# Altium PCB ESC.PcbDoc (part 1 of 2)
Units mil, origin at the board's own origin, x right, y up, seen from the top; angles counter-clockwise.
Board outline 7000 x 5000 mil, 2 copper layers (Top Layer, Bottom Layer), stack 64.567 mil thick; 83 components, 105 nets, 405 pads, 157 vias.
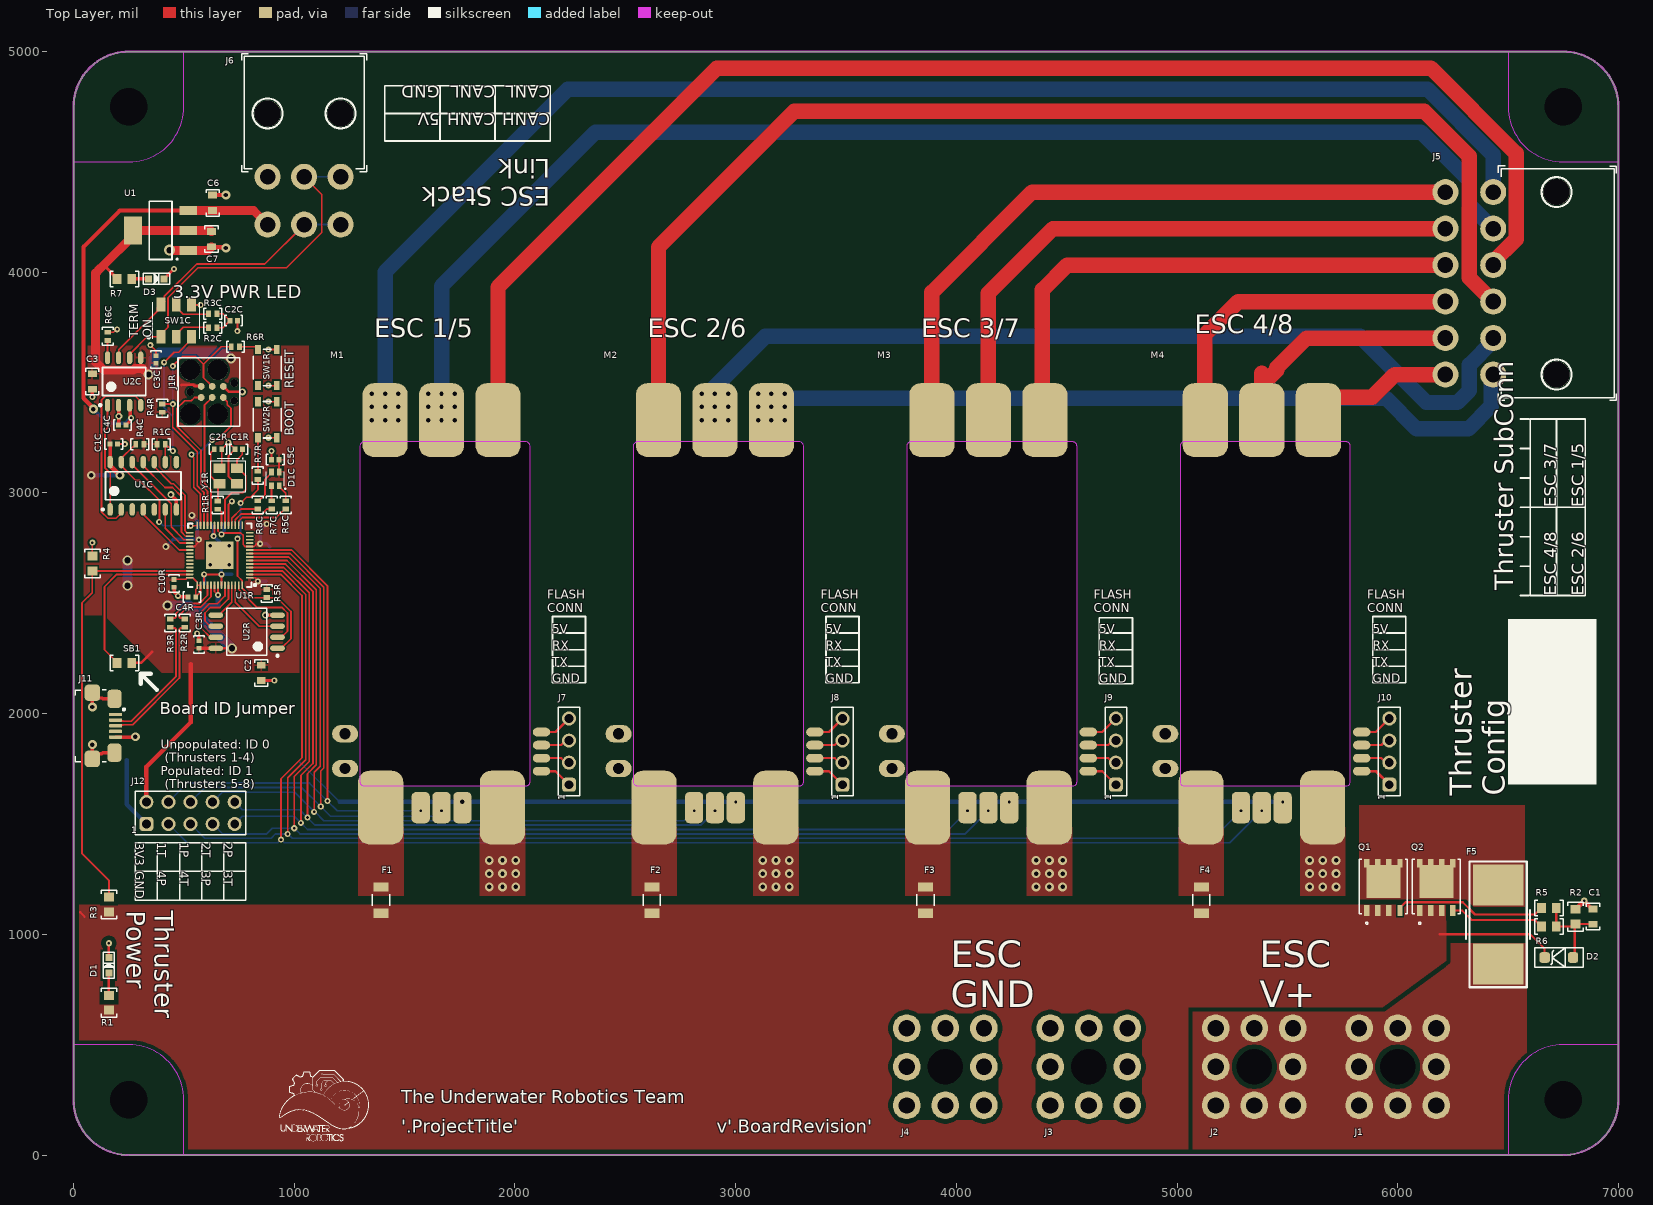
[diagram p0: Top Layer view]
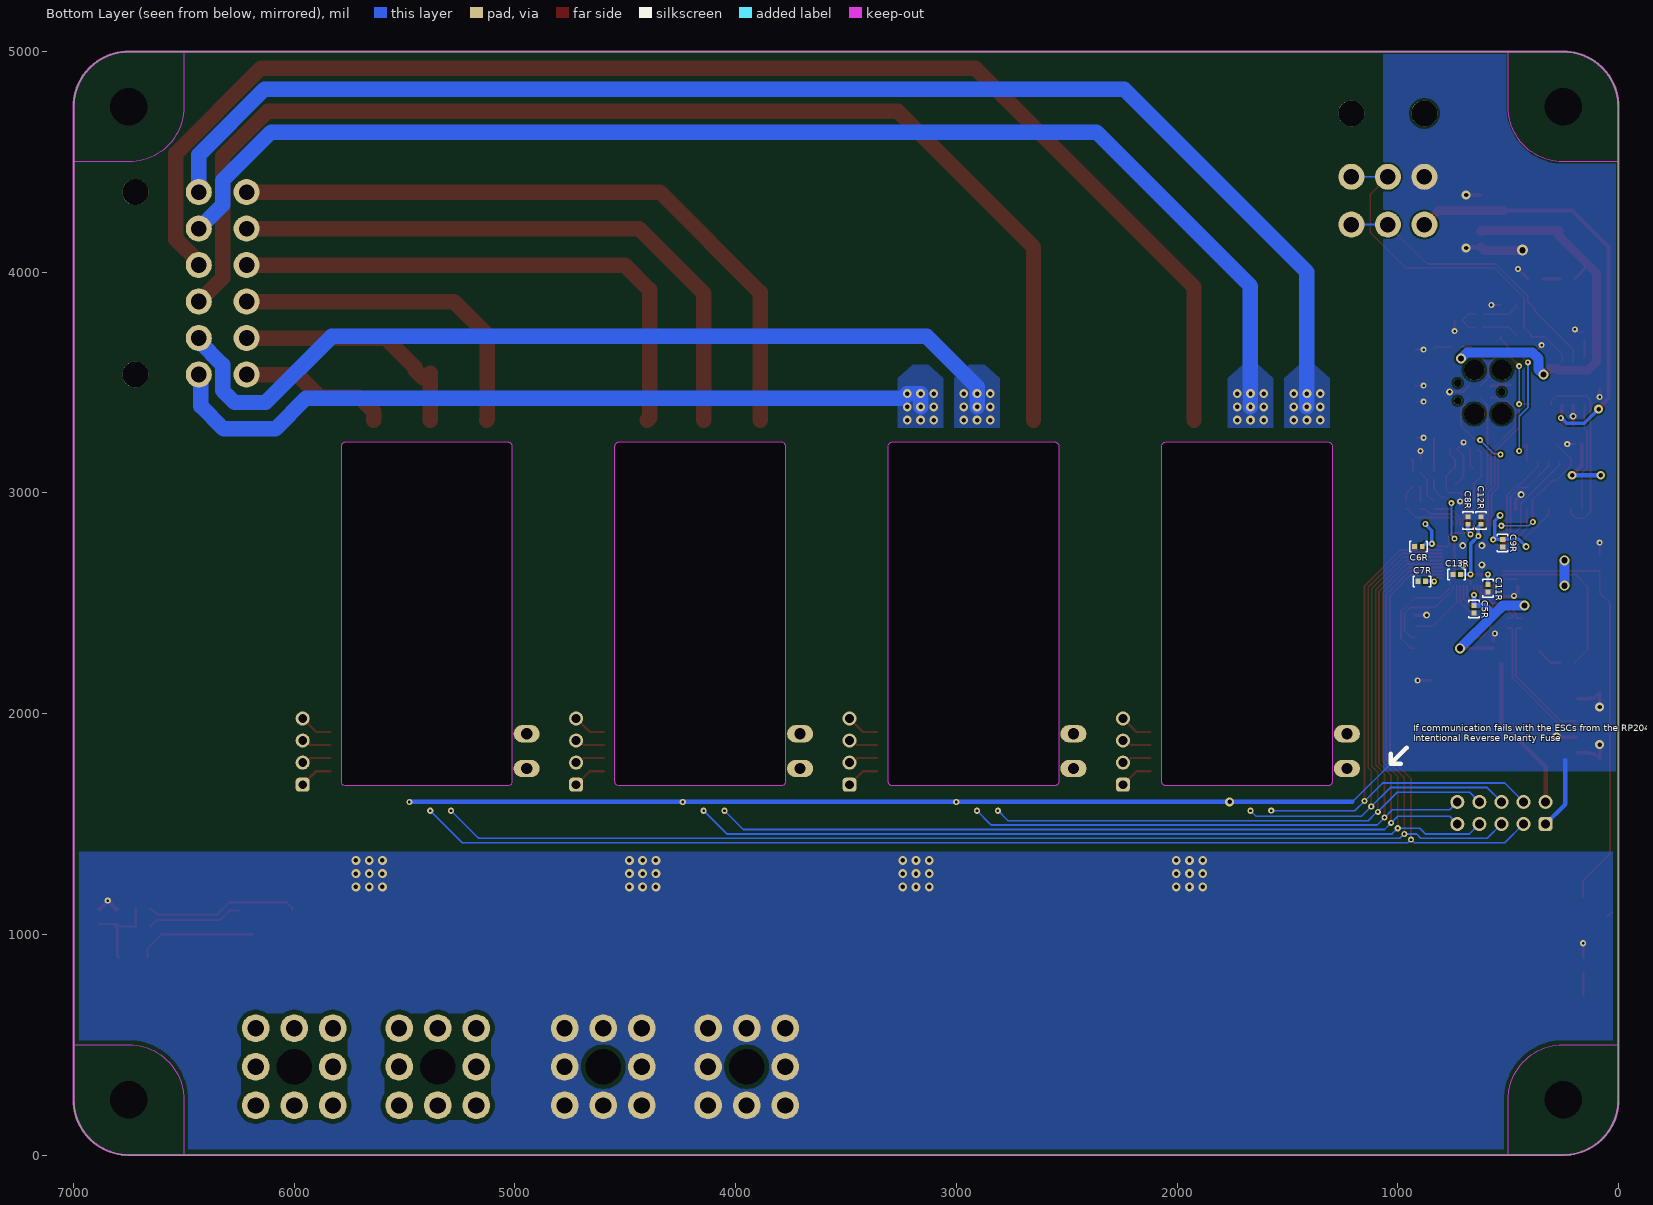
[diagram p1: Bottom Layer view, seen from below]
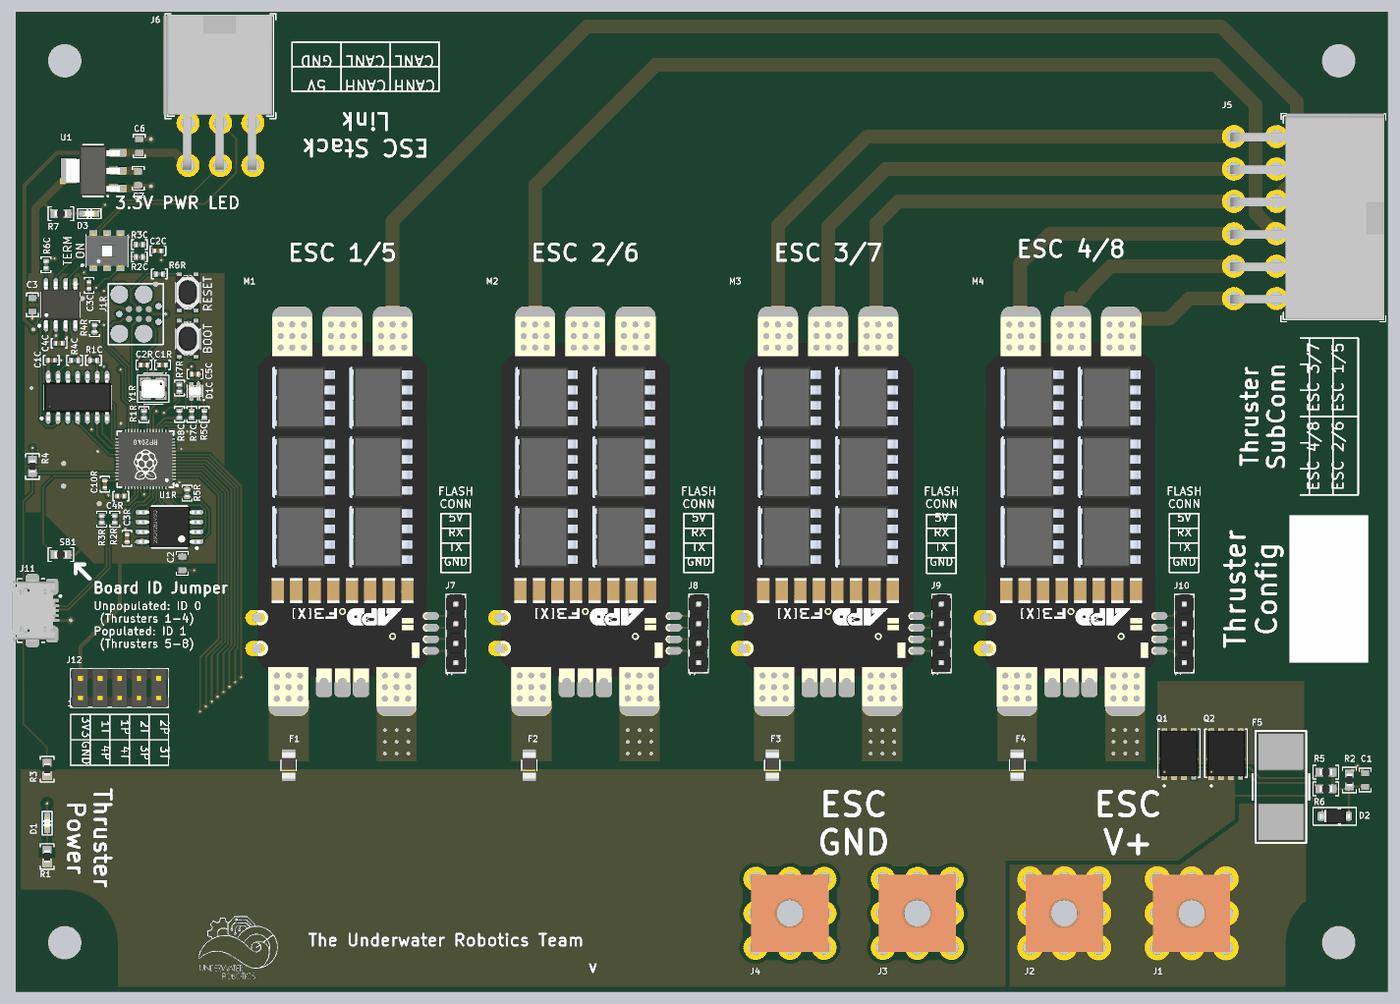
[diagram p3: 3D render of the assembled board from above, using the file's embedded part models]
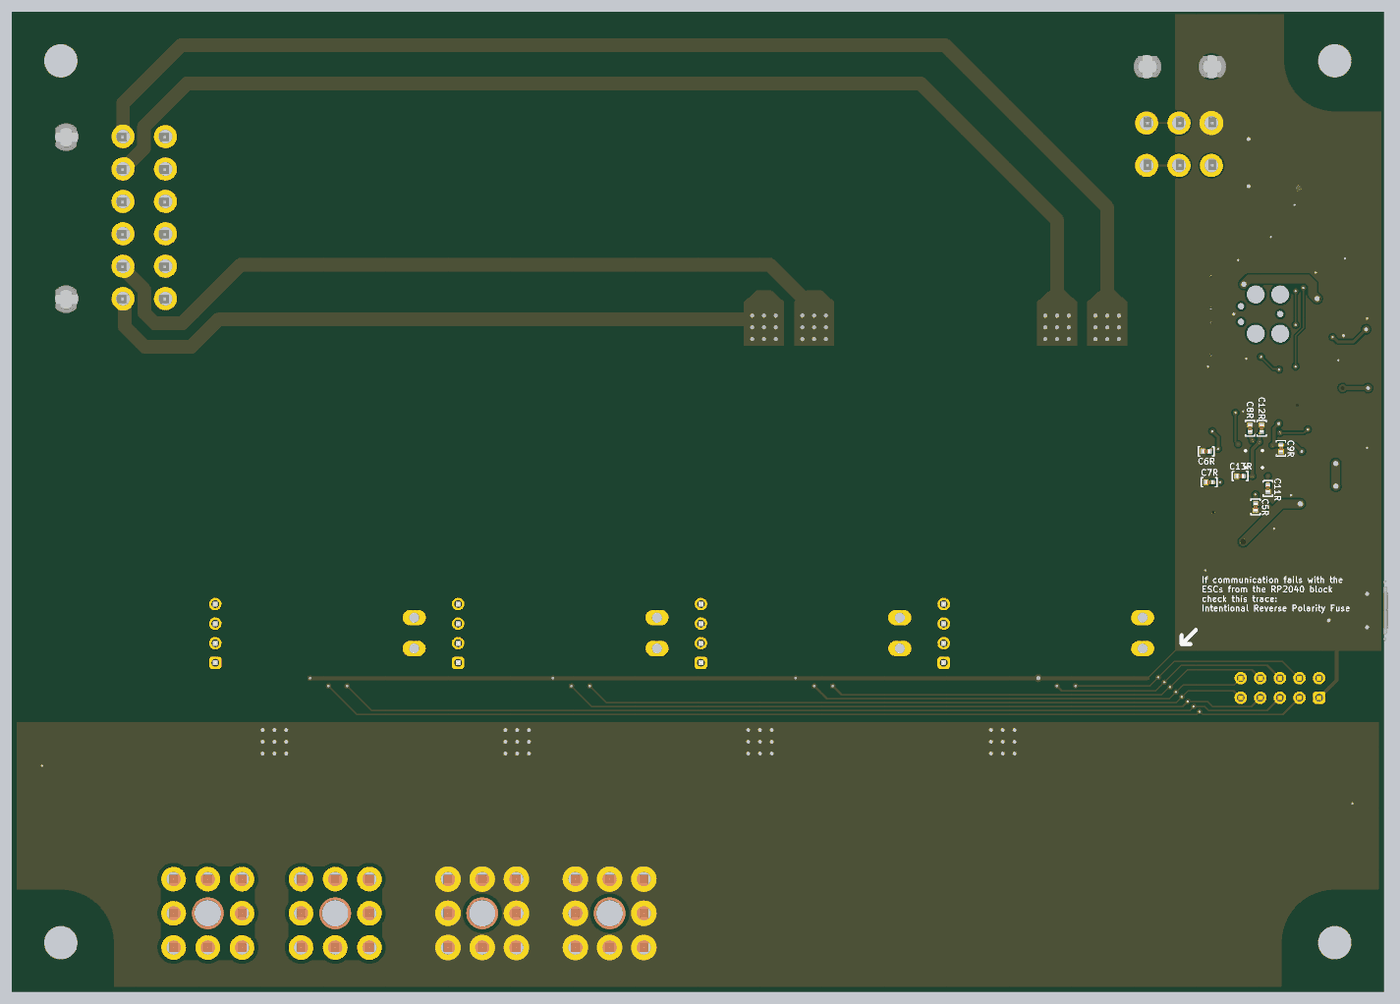
[diagram p4: 3D render of the assembled board from below, using the file's embedded part models]

## Layer stack, top to bottom
Top Solder: solder mask 0.5, Solder Resist, Dk 3.8
Top Layer: signal copper 2.7559
Dielectric: core 59.0551, FR-4, Dk 4.5
Bottom Layer: signal copper 2.7559
Bottom Solder: solder mask 0.5, Solder Resist, Dk 3.8

## Board outline
250,0 cw(c250,250) 0,250 0,4750 cw(c250,4750) 250,5000 6750,5000 cw(c6750,4750) 7000,4750 7000,250 cw(c6750,250) 6750,0

## Design rules (kind name [scope] priority, off if disabled: settings)
BoardOutlineClearance "BoardOutlineClearance JLCPCB" [All] p1: gap=7.87 ignorepadtopadclearanceinfootprint=FALSE
Clearance "Clearance Power" [InNet('VCC') or InNet('GND') or InNet('VIN') vs not InNet('NetQ1_4')] p1: gap=20 ignorepadtopadclearanceinfootprint=FALSE except(10: Arc-Hole Track-Hole SMDPad-Region SMDPad-Hole THPad-Hole Via-Hole Fill-Hole Poly-Hole Region-Hole Text-Hole)
Clearance "Clearance JLCPCB 2oz" [All] p2: gap=7.87 ignorepadtopadclearanceinfootprint=FALSE except(10: Arc-Hole Track-Hole SMDPad-Hole THPad-Hole Via-Hole Fill-Hole Poly-Hole Region-Hole Text-Hole)
DiffPairsRouting [All] p1: maxlimit=10 minlimit=6 mostfreqgap=8 toplayer_minwidth=8 toplayer_maxwidth=15 toplayer_prefwidth=8 bottomlayer_minwidth=8 bottomlayer_maxwidth=15 bottomlayer_prefwidth=8 maxuncoupledlength=500
HoleSize "HoleSize JLCPCB Pad" [IsPad] p1: absolutevalues=TRUE maxlimit=248.03 minlimit=19.68 maxpercent=80.000 minpercent=20.000
HoleSize "HoleSize JLCPCB 2 layer" [All] p2: absolutevalues=TRUE maxlimit=248.03 minlimit=11.81 maxpercent=80.000 minpercent=20.000
HoleToHoleClearance "HoleToHoleClearance JLCPCB" [All] p1: gap=10 allowstackedmicrovias=TRUE
MinimumAnnularRing "MinimumAnnularRing JLCPCB Pad" [IsPad] p1: minimumring=11.81
MinimumAnnularRing "MinimumAnnularRing JLCPCB 2oz" [All] p2: minimumring=7.87
MinimumSolderMaskSliver [All] p1: minsoldermaskwidth=1
PlaneConnect [All] p1: planeconnectstyle=Direct reliefexpansion=20 reliefentries=4 reliefconductorwidth=10 reliefairgap=10
PolygonConnect "PolygonConnect 3V3" [InNet('3V3')] p1: thpad.connectstyle=Relief thpad.reliefconductorwidth=10 thpad.reliefentries=4 thpad.polygonreliefangle="90 Angle" thpad.airgapwidth=10 smdpad.connectstyle=Relief smdpad.reliefconductorwidth=10 smdpad.reliefentries=4 smdpad.polygonreliefangle="90 Angle" smdpad.airgapwidth=10 via.connectstyle=Direct via.reliefconductorwidth=10 via.reliefentries=4 via.polygonreliefangle="90 Angle" via.airgapwidth=10
PolygonConnect [All] p2: connectstyle=Direct reliefconductorwidth=15 reliefentries=4 polygonreliefangle="45 Angle" airgapwidth=10
RoutingVias "RoutingVias JLCPCB" [All] p1: holewidth=15.75 width=31.5 viastyle="Through Hole" minholewidth=11.81 minwidth=15.75 maxholewidth=28 maxwidth=50
SilkToSilkClearance [All] p1: silktosilkclearance=3
SilkToSolderMaskClearance "SilkToSolderMaskClearance JLCPCB" [IsPad] p1: minsilkscreentomaskgap=5.91 clearancetoexposedcopper=TRUE
SolderMaskExpansion "SolderMaskExpansion JLCPCB" [All] p1: expansion=1.97 istentingtop=FALSE
Width "Width JLCPCB 2oz" [All] p1: maxlimit=200 minlimit=7.87 preferedwidth=10 minimp=50.000000 maximp=50.000000 favimp=50.000000
23 further rules are at their usual default settings.

## Classes and differential pairs
component class U_RP2040_C: C1R C2R C3R C4R C5R C6R C7R C8R C9R C10R C11R C12R C13R J1R R1R R2R R3R R4R R5R R6R R7R SW1R SW2R U1R U2R Y1R
differential pair class "USB 2.0": USB USB_RP2040
component class U_RP2040_with_CAN: C1C C2C C3C C4C C5C D1C R1C R2C R3C R4C R5C R6C R7C R8C SW1C U1C U2C
component class ESC: C1 C2 C3 C4 C5 C6 C7 D1 D2 D3 F1 F2 F3 F4 F5 J1 J2 J3 J4 J5 J6 J7 J8 J9 J10 J11 J12 M1 M2 M3 M4 Q1 Q2 R1 R2 R3 R4 R5 R6 R7 SB1 SB? U1
differential pair USB: +USB_P -USB_N
differential pair USB_RP2040: +USB_RP2040_P -USB_RP2040_N

## Components (designator, comment, footprint, x,y, rotation, side; value= is the part's Value field where it differs from the comment)
C1 "1uF Ceramic 16V" CAPACITOR_0603 6885,1080 r270 top value=1uF
C1C "100nF Ceramic 25V" CAPACITOR_0402 181.81,3221.6 r0 top value=0.1uF
C1R "27pF Ceramic 50V" CAPACITOR_0402 748.74,3197.98 r180 top value=27pF
C2 "10uF Ceramic 6.3V" CAPACITOR_0603 850,2185 r270 top
C2C "4700pF Ceramic 25V" CAPACITOR_0402 725.12,3780.66 r180 top value=4.7nF
C2R "27pF Ceramic 50V" CAPACITOR_0402 654.25,3197.98 r0 top value=27pF
C3 "10uF Ceramic 6.3V" CAPACITOR_0603 85,3505 r270 top
C3C "100nF Ceramic 25V" CAPACITOR_0402 373.94,3604.63 r90 top value=0.1uF
C3R "100nF Ceramic 6.3V" CAPACITOR_0402 567.64,2313.33 r90 top value=0.1uF
C4C "100nF Ceramic 25V" CAPACITOR_0402 221.18,3308.22 r180 top value=0.1uF
C4R "1uF Ceramic 16V" CAPACITOR_0402 536.14,2528.69 r180 top value=1uF
C5C "1uF Ceramic 16V" CAPACITOR_0402 914.09,3150.74 r180 top value=1uF
C5R "100nF Ceramic 6.3V" CAPACITOR_0402 654.25,2473.57 r270 bottom value=0.1uF
C6 "10uF Ceramic 6.3V" CAPACITOR_0603 630,4315 r90 top
C6R "100nF Ceramic 6.3V" CAPACITOR_0402 906.22,2757.03 r0 bottom value=0.1uF
C7 "10uF Ceramic 6.3V" CAPACITOR_0603 625,4150 r270 top
C7R "100nF Ceramic 6.3V" CAPACITOR_0402 890.47,2599.55 r0 bottom value=0.1uF
C8R "100nF Ceramic 6.3V" CAPACITOR_0402 681.92,2875.14 r90 bottom value=0.1uF
C9R "100nF Ceramic 6.3V" CAPACITOR_0402 524.33,2772.78 r270 bottom value=0.1uF
C10R "100nF Ceramic 6.3V" CAPACITOR_0402 455,2590 r270 top value=0.1uF
C11R "1uF Ceramic 16V" CAPACITOR_0402 591.26,2568.06 r270 bottom value=1uF
C12R "100nF Ceramic 6.3V" CAPACITOR_0402 622.76,2875.14 r90 bottom value=0.1uF
C13R "100nF Ceramic 6.3V" CAPACITOR_0402 732.99,2631.05 r0 bottom value=0.1uF
D1 "150060BS75000" LED_0603 160,860 r90 top
D1C "EAST1616RGBB4" LED_0606_4SMD 914.09,3064.12 r90 top
D2 "Zener_Diode_10V_410mW" SOD-123 6730,895 r180 top
D3 "150060GS75000" LED_0603 375,3970 r0 top
F1 "0685H9150-01" 0501Series_LTF 1392.5,1155 r90 top
F2 "0685H9150-01" 0501Series_LTF 2620,1155 r90 top
F3 "0685H9150-01" 0501Series_LTF 3860,1155 r90 top
F4 "0685H9150-01" 0501Series_LTF 5110,1155 r90 top
F5 "1245HC60-RTR" "2-SMD Fuse" 6455,1045 r90 top
J1 "Redcube M4 Term 85A" "Redcube M4 Term 85A" 6000,400 r0 top locked
J1R "TagConnect SWD" TC2030-MCP 528.27,3457.82 r0 top
J2 "Redcube M4 Term 85A" "Redcube M4 Term 85A" 5350,400 r0 top locked
J3 "Redcube M4 Term 85A" "Redcube M4 Term 85A" 4600,400 r0 top locked
J4 "Redcube M4 Term 85A" "Redcube M4 Term 85A" 3950,400 r0 top locked
J5 "Mini-Fit Jr R/A" "CONN_MOLEX_MINIFIT JR_12 POS_R/A" 6468.03,3950 r90 top locked
J6 "Mini-Fit Jr R/A" "CONN_MOLEX_MINIFIT JR_6 POS_R/A" 1210,4720 r180 top locked
J7 "HEADER VERT 2.54MM" HEADER_4PIN_2.54MM 2245,1678.03 r90 top locked
J8 "HEADER VERT 2.54MM" HEADER_4PIN_2.54MM 3483.95,1678.03 r90 top locked
J9 "HEADER VERT 2.54MM" HEADER_4PIN_2.54MM 4722.9,1678.03 r90 top locked
J10 "HEADER VERT 2.54MM" HEADER_4PIN_2.54MM 5961.85,1678.03 r90 top locked
J11 "USB_MICRO R/A" CONN_MINIUSB 85,1945 r270 top
J12 "HEADER DUAL VERT 2.54MM" HEADER_2X5PIN_2.54MM 330,1500 r0 top
M1 "APD 80F3[X]" "APD 80F3[X]" 1667.24,1578.03 r90 top locked
M2 "APD 80F3[X]" "APD 80F3[X]" 2906.19,1578.03 r90 top locked
M3 "APD 80F3[X]" "APD 80F3[X]" 4145.14,1578.03 r90 top locked
M4 "APD 80F3[X]" "APD 80F3[X]" 5384.09,1578.03 r90 top locked
Q1 "MOSFET P-Ch 30V 60A SO-8" MOSFET_7DP-T1-GE3_VIS 5935,1215 r90 top
Q2 "MOSFET P-Ch 30V 60A SO-8" MOSFET_7DP-T1-GE3_VIS 6175,1215 r90 top
R1 "1k Ohm 5% 1/8W" RESISTOR_0603 160,690 r90 top
R1C "10k Ohm 1% 1/16W" RESISTOR_0402 396.97,3221.6 r0 top
R1R "1k Ohm 1% 1/16W" RESISTOR_0402 654.25,2944.95 r90 top
R2 "1k Ohm 5% 1/8W" RESISTOR_0603 6805,1080 r90 top
R2C "60.4 Ohm 1% 1/16W" RESISTOR_0402 630.63,3749.16 r0 top
R2R "27 Ohm 1% 1/16W" RESISTOR_0402 504.65,2410.58 r90 top
R3 "10k Ohm 0.5% 1/10W" RESISTOR_0603 160,1135 r90 top
R3C "60.4 Ohm 1% 1/16W" RESISTOR_0402 630.63,3812.15 r0 top
R3R "27 Ohm 1% 1/16W" RESISTOR_0402 438.64,2410.58 r90 top
R4 "1k Ohm 5% 1/10W" RESISTOR_0603 85,2680.3 r90 top
R4C "10k Ohm 1% 1/16W" RESISTOR_0402 299.92,3221.6 r180 top
R4R "10k Ohm 1% 1/16W" RESISTOR_0402 402.28,3384 r90 top
R5 "27 Ohm 5% 1/8W" RESISTOR_0603 6685,1120 r0 top
R5C "604 Ohm 1% 1/16W" RESISTOR_0402 961.34,2946.01 r90 top
R5R "10k Ohm 1% 1/16W" RESISTOR_0402 874.72,2544.44 r270 top
R6 "27 Ohm 5% 1/8W" RESISTOR_0603 6685,1035 r180 top
R6C "10k Ohm 1% 1/16W" RESISTOR_0402 154.06,3709.79 r90 top
R6R "1k Ohm 1% 1/16W" RESISTOR_0402 732.99,3662.55 r180 top
R7 "62 Ohm 1% 1/4W" RESISTOR_0603 230,3970 r180 top
R7C "200 Ohm 1% 1/16W" RESISTOR_0402 898.35,2946.01 r90 top
R7R "1k Ohm 1% 1/16W" RESISTOR_0402 835.35,3079.87 r270 top
R8C "200 Ohm 1% 1/16W" RESISTOR_0402 835.35,2946.01 r90 top
SB1 "0 Ohm Jumper No Fit" RESISTOR_0603 230,2230 r0 top
SW1C "Switch DPDT" CAS-220TA 465.28,3780.66 r0 top
SW1R "434123025826" SMD_434123025826 877.68,3568.06 r90 top
SW2R "434123025826" SMD_434123025826 877.68,3331.84 r90 top
U1 "LM1117IMPX-3.3/NOPB" SOT-223-4 394.49,4189.49 r180 top
U1C "MCP2517FD" SOIC-14 315.67,3032.62 r90 top
U1R "RP2040" "QFN-56 RP2040" 662.13,2717.66 r180 top locked
U2C "CAN Transceiver" SOIC-8 229.06,3505.07 r90 top
U2R "W25Q128JVSIQ" "SOIC-8 W25QxJV" 784.23,2371.21 r180 top
Y1R "CRYSTAL 12.0000MHZ 18PF SMD" "4-SMD, NO LEAD CRYSTAL 3.2x2.5mm" 740.87,3111.37 r180 top

## Footprints (in the part's own frame and the unit in brackets; to place one, negate y for a bottom-side part, rotate by r counter-clockwise, add the part's x,y. Pads: shape width x height; smd on the part's side, far side on the other; paste and mask are expansions set on the pad)
"2-SMD Fuse" [mm]
  rect 4.7x5.8 smd paste+0 mask+0: 1(-4.55,0) 2(4.55,0)
  silkscreen extent -7.24,-3.68 7.24,3.68
"4-SMD, NO LEAD CRYSTAL 3.2x2.5mm" [mm]
  rrect0% 1.4x1.1 smd: 1(0,0) 2(2.032,0) 3(2.032,1.778) 4(0,1.778)
  silkscreen extent -1.02,-1.2 3.05,2.92, body extent -0.58,-0.36 2.62,2.14, height 0.82
0501Series_LTF [mil]
  rect 42x68 smd paste+0 mask+0: 1(-59.5,0) 2(59.5,0)
  silkscreen extent -26,-39 26,39, body extent -66,-34 66,34, height 23
"APD 80F3[X]" [mm] "Advanced Power Drives 80F3[X] ESC"
  rrect50% 8.5x5.2 smd: 1(-0.1,7) 2(-0.1,-7) 3(44.5,6.5) 4(44.5,0) 5(44.5,-6.5)
  oval 2x3 hole 1.3: 6(4.4,11.1) 7(8.4,11.1)
  rrect50% 3.6x2.1 smd: 8(-0.1,2.4) 9(-0.1,0) 10(-0.1,-2.4)
  oval 1x2 smd: 11(4.1,-11.5) 12(5.6,-11.5) 13(7.1,-11.5) 14(8.6,-11.5)
  Keep-Out Layer board cut-out: 2.4,8.9 2.4,-9.7 2.438,-9.891 2.546,-10.054 2.709,-10.162 2.9,-10.2 2.9,-10.2 41.5,-10.2 41.691,-10.162 41.854,-10.054 41.962,-9.891 42,-9.7 42,-9.7 42,8.9 41.962,9.091 41.854,9.254 41.691,9.362 41.5,9.4 41.5,9.4 2.9,9.4 2.709,9.362 2.546,9.254 2.438,9.091 2.4,8.9
  body extent -3.1,-11 47.4,11, height 4.21
CAPACITOR_0402 [mm]
  rect 0.56x0.6 smd: 1(-0.435,0) 2(0.435,0)
  silkscreen extent -1.02,-0.6 1.02,0.6, body extent -0.5,-0.28 0.5,0.27, height 0.51
CAPACITOR_0603 [mil] "CAPACITOR 0603"
  rect 30x40 smd: 1(-35,0) 2(35,0)
  silkscreen extent -60,-30 60,30, body extent -31,-16 32,16, height 31
CAS-220TA [mm] "SWITCH SLIDE DPDT 100MA 6V"
  rrect0% 1x1.6 smd: 1(-1.75,-1.85) 2(0,-1.85) 3(1.75,-1.85) 4(-1.75,1.85) 5(0,1.85) 6(1.75,1.85)
  silkscreen extent -3.3,-2.1 2.7,2.1, body extent -2.7,-2.1 2.7,2.1, height 2.51
CONN_MINIUSB [mm] "USB2.0 Micro-B Receptacle SMD R/A"
  rrect50% 0.4x1.5 smd: 1(-1.3,2.675) 2(-0.65,2.675) 3(0,2.675) 4(0.65,2.675) 5(1.3,2.675)
  rrect50% 2.1x1.6 smd: 6(-3.1,2.55) 7(3.1,2.55)
  rrect50% 1.9x1.8 smd: 8(3.8,0) 9(-3.8,0)
  silkscreen extent -4.14,-1.96 4.11,3.75, body extent -3.96,-2.67 3.96,2.99, height 2.72
"CONN_MOLEX_MINIFIT JR_6 POS_R/A" [mm] "Molex Minifit Jr 5569 6 Pos R/A"
  round 3 hole 1.801: 1(8.4,7.3) 4(8.4,12.8)
  round 3 hole 1.8: 2(4.2,7.3) 3(0,7.3) 5(4.2,12.8) 6(0,12.8)
  round 3 hole 3 unplated mask+0: ""(0,0) ""(8.4,0)
  silkscreen extent -2.98,-6.86 11.38,6.73, body extent -2.58,-6.6 11.62,13.33, height 11.4
"CONN_MOLEX_MINIFIT JR_12 POS_R/A" [mm] "Molex Minifit Jr 5569 12 Pos R/A"
  round 3 hole 1.801: 1(10.5,0.9) 2(6.3,0.9) 3(2.1,0.9) 4(-2.1,0.9) 7(10.5,6.4) 8(6.3,6.4) 9(2.1,6.4) 10(-2.1,6.4)
  round 3 hole 1.8: 5(-6.3,0.9) 6(-10.5,0.9) 11(-6.3,6.4) 12(-10.5,6.4)
  round 3 hole 3 unplated mask+0: ""(-10.5,-6.4) ""(10.5,-6.4)
  silkscreen extent -13.48,-13.27 13.51,0.33, body extent -13.27,-13.08 13.53,6.85, height 11.01
HEADER_2X5PIN_2.54MM [mm]
  rrect50% 1.62x1.62 hole 1.02: 1(0,0)
  round 1.62 hole 1.02: 2(0,2.54) 3(2.54,0) 4(2.54,2.54) 5(5.08,0) 6(5.08,2.54) 7(7.62,0) 8(7.62,2.54)
  round 1.62 hole 1: 9(10.16,0) 10(10.16,2.54)
  silkscreen extent -1.27,-1.25 11.43,3.79, body extent -1.27,-1.27 11.43,3.81, height 9.5
HEADER_4PIN_2.54MM [mm]
  rrect50% 1.62x1.62 hole 1.02: 1(0,0)
  round 1.62 hole 1.02: 2(2.54,0) 3(5.08,0) 4(7.62,0)
  silkscreen extent -1.27,-1.25 8.89,1.25, body extent -1.27,-1.27 8.89,1.27, height 10.48
LED_0603 [mil] "LED 0603"
  rect 32x32 smd: 1(-35,0) 2(35,0)
  silkscreen extent -60,-25 60,25, body extent -31,-16 32,16, height 28
LED_0606_4SMD [mm]
  rrect0% 0.8x0.55 smd: 1(-0.8,-0.45) 2(-0.8,0.45) 3(0.8,0.45) 4(0.8,-0.45)
  silkscreen extent -1.22,-1.22 0.8,1.02, body extent -0.8,-0.8 0.8,0.8, height 0.35
MOSFET_7DP-T1-GE3_VIS [mil]
  rect 50x24 smd: 1(-107.5,75) 2(-107.5,25) 3(-107.5,-25) 4(-107.5,-75)
  rect 150x154 smd: D(24.5,0)
  rect 40x24 smd: D(107.5,-75) D(107.5,-25) D(107.5,25) D(107.5,75)
  silkscreen extent -169,-109 125,109, body extent -121,-101 121,101, height 41
"QFN-56 RP2040" [mm] "QFN, 56-Leads, Body 7.00x7.00mm, Pitch 0.40mm, Thermal Pad 3.10x3.10mm, IPC Medium Density"
  oval 0.875x0.2 smd: 1(-3.437,2.6) 2(-3.437,2.2) 3(-3.437,1.8) 4(-3.437,1.4) 5(-3.437,1) 6(-3.437,0.6) 7(-3.437,0.2) 8(-3.437,-0.2) 9(-3.437,-0.6) 10(-3.437,-1) 11(-3.437,-1.4) 12(-3.437,-1.8) 13(-3.437,-2.2) 14(-3.437,-2.6) 29(3.437,-2.6) 30(3.437,-2.2) 31(3.437,-1.8) 32(3.437,-1.4) 33(3.437,-1) 34(3.437,-0.6) 35(3.437,-0.2) 36(3.437,0.2) 37(3.437,0.6) 38(3.437,1) 39(3.437,1.4) 40(3.437,1.8) 41(3.437,2.2) 42(3.437,2.6)
  oval 0.2x0.875 smd: 15(-2.6,-3.437) 16(-2.2,-3.437) 17(-1.8,-3.437) 18(-1.4,-3.437) 19(-1,-3.437) 20(-0.6,-3.437) 21(-0.2,-3.437) 22(0.2,-3.437) 23(0.6,-3.437) 24(1,-3.437) 25(1.4,-3.437) 26(1.8,-3.437) 27(2.2,-3.437) 28(2.6,-3.437) 43(2.6,3.437) 44(2.2,3.437) 45(1.8,3.437) 46(1.4,3.437) 47(1,3.437) 48(0.6,3.437) 49(0.2,3.437) 50(-0.2,3.437) 51(-0.6,3.437) 52(-1,3.437) 53(-1.4,3.437) 54(-1.8,3.437) 55(-2.2,3.437) 56(-2.6,3.437)
  rect 3.2x3.2 smd: 57(0,0)
  silkscreen extent -4.19,-3.65 3.65,3.65, body extent -3.52,-3.52 3.52,3.52, height 0.85
"Redcube M4 Term 85A" [mm]
  round 3.2 hole 1.85: 1(-4.435,-4.435) 1(-4.435,0) 1(-4.435,4.435) 1(0,-4.435) 1(0,4.435) 1(4.435,-4.435) 1(4.435,0) 1(4.435,4.435)
  round 3.2 hole 4.1 unplated: 8(0,0)
  body extent -5,-5 5,5, height 3
RESISTOR_0402 [mm] "Resistor 0402"
  rect 0.55x0.75 smd: 1(-0.475,0) 2(0.475,0)
  silkscreen extent -1.02,-0.64 1.02,0.64, body extent -0.5,-0.25 0.5,0.25, height 0.25
RESISTOR_0603 [mil] "Resistor 0603"
  rect 40x45 smd: 1(-33.5,0) 2(33.5,0)
  silkscreen extent -65,-35 65,35, body extent -31,-16 32,16, height 16
SMD_434123025826 [mm]
  rect 1.05x0.65 smd: A1(-2.075,1.075) A2(2.075,1.075) B1(-2.075,-1.075) B2(2.075,-1.075)
  silkscreen extent -2.1,-1.6 2.1,1.6, body extent -2.3,-1.6 2.3,1.6, height 2.5
SOD-123 [mm] "Schottky Diode SOD-123"
  rrect50% 1.2x1.22 smd: 1(-1.635,0) 2(1.635,0)
  silkscreen extent -2.79,-1.14 2.79,1.14, body extent -1.95,-0.9 1.95,0.9, height 1.18
SOIC-8 [mm] "SOIC, 8-Leads, Body 4.90x3.90mm, Pitch 1.27mm, IPC Medium Density"
  oval 1.45x0.6 smd: 1(-2.725,1.905) 2(-2.725,0.635) 3(-2.725,-0.635) 4(-2.725,-1.905) 5(2.725,-1.905) 6(2.725,-0.635) 7(2.725,0.635) 8(2.725,1.905)
  silkscreen extent -2.85,-2.5 1.6,2.88, body extent -3,-2.5 3,2.5, height 1.75
"SOIC-8 W25QxJV" [mm] "SOIC, 8-Leads, Body 5.28x5.28mm, Pitch 1.27mm, IPC Medium Density"
  oval 1.7x0.6 smd: 1(-3.55,1.905) 2(-3.55,0.635) 3(-3.55,-0.635) 4(-3.55,-1.905) 5(3.55,-1.905) 6(3.55,-0.635) 7(3.55,0.635) 8(3.55,1.905)
  silkscreen extent -3.68,-2.7 2.3,2.88, body extent -3.95,-2.62 3.95,2.62, height 1.95
SOIC-14 [mm] "SOIC, 14-Leads, Body 8.65x3.90mm, Pitch 1.27mm, IPC Medium Density"
  oval 1.45x0.6 smd: 1(-2.725,3.81) 2(-2.725,2.54) 3(-2.725,1.27) 4(-2.725,0) 5(-2.725,-1.27) 6(-2.725,-2.54) 7(-2.725,-3.81) 8(2.725,-3.81) 9(2.725,-2.54) 10(2.725,-1.27) 11(2.725,0) 12(2.725,1.27) 13(2.725,2.54) 14(2.725,3.81)
  silkscreen extent -2.85,-4.35 1.6,4.78, body extent -3,-4.4 3,4.4, height 1.7
SOT-223-4 [mm]
  rect 2.05x1 smd paste+0 mask+0.102: 1(-3.175,2.3) 2(-3.175,0) 3(-3.175,-2.3)
  rect 2.05x3.25 smd paste+0 mask+0.102: 4(3.175,0)
  silkscreen extent -1.96,-3.35 1.3,3.35, body extent -3.5,-3.25 3.5,3.25, height 1.68
TC2030-MCP [mil]
  round 31 smd: 1(50,-25) 2(50,25) 3(100,-25) 4(100,25) 5(150,-25) 6(150,25)
  round 34 hole 35 unplated: A(0,0) B(200,40) C(200,-40)
  round 92 hole 93 unplated: D(0,-100) E(125,-100) F(0,100) G(125,100)
  silkscreen extent -55,-155 225,155

## Part data
C1: library part CAPACITOR_1uF_0603, "Cap 1uF 16V +/-10% / Ceramic 0603", Supplier Part Number 1=399-7847-1-ND, Tolerance="+/- 10%", Voltage=16V, Made By="Flip B", Supplier 1=Digi-Key
C1C C3C C3R C4C C5R C6R C7R C8R C9R C10R C12R C13R: library part CAPACITOR_0.1uF_0402, "Cap 100nF 25V +/-10% / Ceramic 0402", Supplier Part Number 1=478-7868-1-ND, Tolerance="+/- 10%", Voltage=25V, Made By="Robert Pafford", Supplier 1=Digi-Key
C1R C2R: library part CAPACITOR_0.000027uF_0402, "Cap 27pF 50V +/-5% / Ceramic 0402", Supplier Part Number 1=445-5589-1-ND, Tolerance="+/- 5%", Voltage=50V, Made By="Robert Pafford", Supplier 1=Digi-Key
C2 C3 C6 C7: library part CAPACITOR_10uF_0603, "Cap 10uF 6.3V +/-20% / Ceramic 0603", Supplier Part Number 1=1276-1119-1-ND, Tolerance="+/- 20%", Value (uF)="10 uF", Voltage=6.3V, ComponentLink1Description=Digikey, ComponentLink1URL=https://www.digikey.com/en/products/detail/samsung-electro-mechanics/CL10A106MQ8NNNC/3886777, Made By="Flip B", Supplier 1=Digi-Key
C2C: library part CAPACITOR_0.0047uF_0402, "4700 pF +/-10% 25V Ceramic Capacitor X7R 0402", Supplier Part Number 1=478-6195-1-ND, Tolerance="+/- 10%", Voltage=25V, Made By="Robert Pafford", Supplier 1=Digi-Key
C4R C5C C11R: library part CAPACITOR_1uF_0402, "Cap 1uF 16V +/-10% / Ceramic 0402", Supplier Part Number 1=478-0402YD105KAT4ADKR-ND, Tolerance="+/- 10%", Voltage=16V, Made By="Robert Pafford", Supplier 1=Digi-Key
D1: library part LED_Blue_0603, "LED Blue Vf= 3.2V If = 0.020A / 150060BS75000", Color=Blue, Forward Current=20mA, Forward Voltage=3.2V, Package=0603, Supplier Part Number 1=732-4966-1-ND, Made By="Robert Pafford", Supplier 1=Digi-Key
D1C: library part LED_RGB_4SMD, "LED RGB CLEAR 4SMD", Blue Forward Current=5mA, Blue Forward Voltage=2.8V, Color=RGB, Package=4-SMD, Red Forward Voltage=1.8V, Supplier Part Number 1=1080-1552-1-ND, ComponentLink1Description=Datasheet, ComponentLink1URL=https://everlightamericas.com/index.php?controller=attachment&id_attachment=3220, Green Forward Current=5mA, Green Forward Voltage=2.8V, Made By="Robert Pafford", Red Forward Current=5mA, Supplier 1=Digi-Key
D2: "Zener Diode", Package=SOD-123, Power=410mW, Supplier Part Number 1=3757-BZT52-C10_R1_00001CT-ND, Voltage - Zener=10V, ComponentLink1Description=Datasheet, ComponentLink1URL=https://www.panjit.com.tw/upload/datasheet/BZT52-C2V4_SERIES.pdf, Made By="Nathan A", Supplier 1=Digi-Key
D3: library part LED_Green_0603_3.2V, "LED Green Vf= 3.2V If = 0.025A / 150060GS75000", Color=Green, Forward Current=25mA, Forward Voltage=3.2V, Package=0603, Supplier Part Number 1=732-4971-1-ND, ComponentLink1Description=Datasheet, ComponentLink1URL=https://www.we-online.de/katalog/datasheet/150060GS75000.pdf, Made By="Flip B", Supplier 1=Digi-Key
F1 F2 F3 F4: library part "Bel Fuse 15A", "Bel Fuse", Breaking Capacity=150A, Current Rating=15, Package=1206, Voltage Rating=32V, Created By="Nathan Ayer", Manufacturer_Part_Number=0685H9150-01, Mfr_Name="Bel Fuse", Response Time="Fast Blow"
F5: library part "Eaton 60A Fuse", "Eaton", Breaking Capacity=1kA, Current Rating=60A, Package=2-SMD, Voltage Rating=80V, ComponentLink1Description=DigiKey, ComponentLink1URL=https://www.digikey.com/en/products/detail/eaton-electronics-division/1245HC60-RTR/13913536, Created By="Nathan Ayer", Manufacturer_Part_Number=1245HC60-RTR, Mfr_Name=Eaton, Response Time="Fast Blow"
J1 J2 J3 J4: Current Rating="85 A", Created By="Nahtan Ayer", Screw Size=M4
J1R: library part TC2030_SWD, "TagConnect TC2030 ARM SWD 6-pin"
J5: library part "CONN_MOLEX_MINIFIT JR_12POS_R/A", "Molex Minifit Jr. 5569  / 12 Pos R/A Natural", Color=Natural, Current Per Pin=13A, Manufacturer=Molex, Supplier Part Number 1=WM21356-ND, ComponentLink1Description=Datasheet, ComponentLink1URL=https://www.molex.com/pdm_docs/ps/PS-5556-001.pdf, Configuration="Right Angle", Created By="Flip B", Number of Positions=12, Pitch=4.2mm, Series="Minifit Jr 5569", Supplier 1=Digi-Key
J6: library part "CONN_MOLEX_MINIFIT JR_6POS_R/A", "Molex Minifit Jr. 5569  / 6 Pos R/A Natural", Color=Natural, Current Per Pin=13A, Manufacturer=Molex, Supplier Part Number 1=WM1353-ND, ComponentLink1Description=Datasheet, ComponentLink1URL=https://www.molex.com/pdm_docs/ps/PS-5556-001.pdf, Configuration="Right Angle", Created By="Flip B", Number of Positions=8, Pitch=4.2mm, Series="Minifit Jr 5569", Supplier 1=Digi-Key
J7 J8 J9 J10: library part HEADER_4PIN_2.54MM, "CONN HEADER VERT 4POS 2.54MM", Supplier Part Number 1=S1012E-04-ND, Made By="Robert Pafford", Supplier 1=Digi-Key
J11: library part CONN_MICROUSB, "Amphenol Micro USB-B / USB2.0 5 Pin Right Angle SMD", Color=Silver, Current Per Pin=1.8A, Manufacturer=Amphenol, Supplier Part Number 1=609-4613-1-ND, ComponentLink1Description=Datasheet, ComponentLink1URL=https://cdn.amphenol-icc.com/media/wysiwyg/files/documentation/datasheet/inputoutput/io_usb_micro.pdf?__cf_chl_jschl_tk__=05693735e19256298f6ef6ca2bb2e65c376a4f56-1625503833-0-Abitsb0-ufjOXJYs_S3J3r2iTn-nObalbmXUksF1VvO_h_WEmRdMlUD1I8-hmWSEVWzY1pirKnrPZWfgY3851qyBZe5ZvnNQePLGIzUgdEIQBVUyW36RsbYpDLEWxJ4horD-5gChFgobLYqwmG5aHl0E8lIn_twwPPrOxilK2gP0q9t_CNOs_u5fMqXvXUrlsOv8tIE2NRlu6NVP8qtkL2GjhlkeTUbDMF8WvvpPDTFOgvZ4Y16Ej8F8AhWos88mo5B1HssXozw0XrkJQIqERITUu6rqloz9kf4ZzhBHtDAt-IkiAFY_Ds9SW8FYKKTtINJVpHZQ6Gyu1FFM4Dc9MO0maE8_mmNcwlxqyRoRk_MPWW8VyByXWM5RSp52jteRKw7FeI9WIYvCbPAOy0Eyib-aseIQsnGbglBcUY6_2xp8GYaJM38H3dNvBPsSOfJBPndKedwKHllxjkucXn6xsN0sDXkpGN-cu8_2bDTJ0g-uUucKSCooYX-ApSDNGpkA_p9zv1SOAD8c0zaZVmtiBsN75QpVz2rzq9_BFxOywPvR, Configuration="Right Angle", Created By="Flip B", Number of Positions=5, Pitch=0.65mm, Series=10118192, Supplier 1=Digi-Key
J12: library part HEADER_2x5PIN_2.54MM, "CONN HEADER VERT 10POS 2.54MM", Supplier Part Number 1=732-2672-ND, Made By="Robert Pafford", Supplier 1=Digi-Key
M1 M2 M3 M4: "Advanced Power Drives 80F3[X] ESC", Manufacturer="Advanced Power Drives", Max Current="80A Continuous", Voltage=15-35V, ComponentLink1Description="General Info", ComponentLink1URL=https://powerdrives.net/80f3, ComponentLink2Description="Data Sheet", ComponentLink2URL=https://docs.powerdrives.net/products/f-series-esc/overview, Created By="Nathan Ayer"
Q1 Q2: library part SIR167DP-T1-GE3, "P-Channel 30 V 60A (Tc) 65.8W (Tc) Surface Mount PowerPAK® SO-8", Mfr_Name=Vishay, Copyright="Copyright (C) 2022 Ultra Librarian. All rights reserved.", Manufacturer_Part_Number=SIR167DP-T1-GE3, RefDes=RefDes, Type=DEV
R1 R2: library part RESISTOR_1K_0603, "RES 1k OHM 5% 1/8W 0603", Digikey Part Numer=CR0603-JW-104ELFTR-ND, Supplier Part Number 1=2019-RK73B1JTTD102JCT-ND, Tolerance="+/- 5%", Value  (Ohms)=1K, ComponentLink1Description=Datasheet, ComponentLink1URL=https://www.bourns.com/docs/product-datasheets/CRxxxxx.pdf, Made By="Robert Pafford", Supplier=Digikey, Supplier 1=Digi-Key, Wattage=1/8W
R1C R4C R4R R5R R6C: library part RESISTOR_10K_0402, "RES 10k OHM 1% 1/16W 0402", Digikey Part Numer=CR0603-JW-104ELFTR-ND, Supplier Part Number 1=YAG3436CT-ND, Tolerance="+/- 1%", Value  (Ohms)=10K, Made By="Robert Pafford", Supplier=Digikey, Supplier 1=Digi-Key, Wattage=1/16W
R1R R6R R7R: library part RESISTOR_1K_0402, "RES 1k OHM 1% 1/16W 0402", Digikey Part Numer=CR0603-JW-104ELFTR-ND, Supplier Part Number 1=13-AC0402FR-131KLCT-ND, Tolerance="+/- 1%", Value  (Ohms)=1K, Made By="Robert Pafford", Supplier=Digikey, Supplier 1=Digi-Key, Wattage=1/16W
R2C R3C: library part RESISTOR_60.4_0402, "RES 60.4 OHM 1% 1/16W 0402", Digikey Part Numer=CR0603-JW-104ELFTR-ND, Supplier Part Number 1=13-AC0402FR-0760R4LCT-ND, Tolerance="+/- 1%", Value  (Ohms)=60.4, Made By="Robert Pafford", Supplier=Digikey, Supplier 1=Digi-Key, Wattage=1/16W
R2R R3R: library part RESISTOR_27_0402, "RES 27 OHM 1% 1/16W 0402", Digikey Part Numer=CR0603-JW-104ELFTR-ND, Supplier Part Number 1=YAG5278DKR-ND, Tolerance="+/- 1%", Value  (Ohms)=27, Made By="Robert Pafford", Supplier=Digikey, Supplier 1=Digi-Key, Wattage=1/16W
R3: library part RESISTOR_10K_0.5%_0603, "RES 10k OHM 0.5% 1/10W 0603", Digikey Part Numer=CR0603-JW-104ELFTR-ND, Supplier Part Number 1=749-1695-1-ND, Tolerance="+/- 0.5%", Value  (Ohms)=10K, Made By="Robert Pafford", Supplier=Digikey, Supplier 1=Digi-Key, Wattage=1/10W
R4: library part RESISTOR_1K_0.5%_0603, "RES 1k OHM 0.5% 1/10W 0603", Digikey Part Numer=CR0603-JW-104ELFTR-ND, Supplier Part Number 1=749-1693-1-ND, Tolerance="+/- 0.5%", Value  (Ohms)=1K, Made By="Robert Pafford", Supplier=Digikey, Supplier 1=Digi-Key, Wattage=1/10W
R5 R6: library part RESISTOR_27_0603, "RES 27 OHM 5% 1/8W 0603", Digikey Part Numer=CR0603-JW-104ELFTR-ND, Supplier Part Number 1=2019-RK73B1JTTD270JCT-ND, Tolerance="+/- 5%", Value  (Ohms)=27, ComponentLink1Description=Datasheet, ComponentLink1URL=https://www.bourns.com/docs/product-datasheets/CRxxxxx.pdf, Made By="Robert Pafford", Supplier=Digikey, Supplier 1=Digi-Key, Wattage=1/8W
R5C: library part RESISTOR_604_0402, "RES 604 OHM 1% 1/16W 0402", Digikey Part Numer=CR0603-JW-104ELFTR-ND, Supplier Part Number 1=13-AC0402FR-07604RLCT-ND, Tolerance="+/- 1%", Value  (Ohms)=604, Made By="Robert Pafford", Supplier=Digikey, Supplier 1=Digi-Key, Wattage=1/16W
R7: library part RESISTOR_62_0603, "RES SMD 62 OHM 1% 1/4W 0603", Digikey Part Numer=CR0603-JW-104ELFTR-ND, Supplier Part Number 1=541-RCS060362R0FKEACT-ND, Tolerance="+/- 1%", Value  (Ohms)=62, ComponentLink1Description=Datasheet, ComponentLink1URL=https://www.bourns.com/docs/product-datasheets/CRxxxxx.pdf, Made By="Robert Pafford", Supplier=Digikey, Supplier 1=Digi-Key, Wattage=1/4W
R7C R8C: library part RESISTOR_200_0402, "RES 200 OHM 1% 1/16W 0402", Digikey Part Numer=CR0603-JW-104ELFTR-ND, Supplier Part Number 1=YAG3453CT-ND, Tolerance="+/- 1%", Value  (Ohms)=200, Made By="Robert Pafford", Supplier=Digikey, Supplier 1=Digi-Key, Wattage=1/16W
SB1: library part JUMPER_0_0603, "0 Ohm Jumper No Fit for Solder Bridge", Value  (Ohms)=0, ComponentLink1Description=Digikey, ComponentLink1URL=https://www.digikey.com/en/products/detail/koa-speer-electronics-inc/RK73B1JTTD101J/9844701, Made By="Robert Pafford"
SW1C: library part CAS-220TA_CAN_TERM, "GOLD SWITCH FLUSH SLIDE DPDT 100MA 6V", Current Rating="100 mA", Supplier Part Number 1=CAS220JCT-ND, Voltage Rating=6VDC, Contact Finish=Gold, Made By="Robert Pafford", Supplier 1=Digi-Key, Switch Function=DPDT
SW1R SW2R: library part "Tactile Switch SMD", "WS-TASV J-Bend SMT Tact Switch, SPST-NO, 16VDC, 50mA, 260g", Manufacturer="Wurth Elektronik", Operating Temperature Max=85°C, Operating Temperature Min=-40°C, Rated Current=50mA, Rated Voltage=16VDC, Category="Tact Switches", Circuit=SPST-NO, ComponentLink1Description="Website Link", ComponentLink1URL=https://www.we-online.com/redexpert/article/434123025826?ad, ComponentLink2Description="Datasheet Link", ComponentLink2URL=https://www.we-online.com/redexpert/spec/434123025826?ad, Contact Material="Stainless Steel", Contact Plating=Silver, Height=2.5mm, Length=4.2mm, Manufacturer Part Number=434123025826, Match Code=WS-TASV, Mount="Surface Mount", Operation Force=260g, Packaging="Tape and Reel", Terminal Material="Copper Alloy", Terminal Plating=Silver, Washable=No, Width=3.2mm
U1: "800-mA 15-V linear voltage regulator 4-SOT-223 -40 to 125", Package="SOT-223-4 Texas Instruments", Arrow_Electronics-Purchase-URL=https://snapeda.com/shop?store=Arrow+Electronics&id=410186, Availability=Good, DigiKey-Purchase-URL=https://snapeda.com/shop?store=DigiKey&id=410186, MF="Texas Instruments", Mouser-Purchase-URL=https://snapeda.com/shop?store=Mouser&id=410186, MP=LM1117IMPX-3.3/NOPB, Price=None, SnapEDA_Link=https://www.snapeda.com/parts/LM1117IMPX-3.3/NOPB/Texas%20Instruments/view-part/410186/?ref=snap, Texas_Instruments-Purchase-URL=https://snapeda.com/shop?store=Texas+Instruments&id=410186
U1C: "CANbus Controller CAN 2.0 SPI Interface 14-SOIC", Made By="Robert Pafford", Max FD Rate="8 Mbps"
U1R: "Raspberry Pi RP2040", Crystal Frequency="12 MHz", Input Voltage=3.3V, Available Busses="SPI, I2C, PWM, USB", ComponentLink1Description=DigiKey, ComponentLink2Description=Datasheet, ComponentLink2URL=https://datasheets.raspberrypi.org/rp2040/rp2040-datasheet.pdf, Made By="Robert Pafford", Number of GPIOs=29
U2C: library part TJA1442AT, "CAN Interface IC High-Speed CAN Transceiver with Standby Mode", Supplier Part Number 1=771-TJA1442AT/0Z, Made By="Robert Pafford", Max Data Rate=5Mbps, Supplier 1=Mouser
U2R: "IC FLASH 128MBIT SPI/QUAD 8SOIC", Supplier Part Number 1=W25Q128JVSIQ-ND, Made By="Robert Pafford", Size=128M, Supplier 1=Digi-Key
Y1R: library part CRYSTAL_12MHz_SMD_SMALL, "12 MHz ±20ppm Crystal 18pF 100 Ohms 4-SMD, No Lead (3.2x2.5mm)", Frequency="12 MHz", Load Capacitance=18pF, Supplier Part Number 1=2151-RH100-12.000-18-2030-EXT-TRCT-ND, ESR="100 Ohms", Made By="Robert Pafford", Supplier 1=Digi-Key

## Free pads (board coordinates)
  round 0 hole 170: 1(250,250) 1(250,4750) 1(6750,250) 1(6750,4750)

## Via types
v1: diameter 40, hole 20, Top Layer to Bottom Layer, tented both sides, 81 vias
v2: diameter 27.56, hole 11.81, Top Layer to Bottom Layer, tented both sides, 34 vias
v3: diameter 28, hole 12, Top Layer to Bottom Layer, tented both sides, 25 vias
v4: diameter 31.5, hole 15.75, Top Layer to Bottom Layer, tented both sides, 10 vias
v5: diameter 45.28, hole 27.56, Top Layer to Bottom Layer, tented both sides, 6 vias
v6: diameter 50, hole 28, Top Layer to Bottom Layer, tented both sides, 1 vias

## Nets (pads, with @x,y where several pads share a name; then routed paths per layer and width w, separated by ;. In a path a pad name is that pad's centre, name@x,y a point inside that pad or via, vN(x,y) a via of type N, cw(c..) or ccw(c..) an arc to the next point about the centre after c; other vN are vias at no path point)
1v1_RP2040: C11R.1 C12R.1 C13R.1 U1R.23 U1R.45 U1R.50 | length 566.9
  Top Layer w7.87: U1R.45@591.26,2582.33 v2(591.26,2631.05) v2(670,2631.05) U1R.50@670,2582.33 ; v2@630.63,2804.28 630.63,2809.61 638.5,2817.48 U1R.23@638.5,2853
  Bottom Layer w15.75: C11R.1@591.26,2585.18 v2(591.26,2631.05) ; C12R.1@622.76,2858.02 623.54,2858.02 630.63,2850.93 630.63,2850.14 634.67,2846.1 v2(634.67,2804.28) 670,2768.95 v2(670,2631.05) C13R.1@715.87,2631.05
3V3: C1C.1 C2.1 C3.1 C3C.1 C3R.1 C4R.1 C5C.1 C5R.1 C6R.1 C7.1 C7R.1 C8R.1 C9R.1 C10R.1 D1C.4 J1R.2 J12.2 R1C.1 R4C.1 R4R.1 R5R.1 R7.2 SB1.2 U1.2 U1.4 U1C.14 U1R.1 U1R.10 U1R.22 U1R.33 U1R.42 U1R.43 U1R.44 U1R.48 U1R.49 U2C.5 U2R.8 | length 5153.5
  Top Layer w7.87: C1C.1@164.69,3221.6 C1C.1@165.18,3221.11 ; C10R.1@457.4,2608.81 508.89,2608.81 513.5,2613.42 513.5,2615.3 U1R.42@526.79,2615.3 540.08,2615.3 U1R.43@559.76,2595.62 ; U1R.33@526.79,2757.03 546.6,2757.03 563.87,2774.3 563.87,2784.76 v2(567.64,2788.53) ; C4R.1@553.27,2528.69 C4R.1@553.27,2529.48 ; U1R.48@638.5,2582.33 638.5,2553.29 v2(654.25,2537.55) U1R.49@654.25,2582.33 ; U1R.22@654.25,2853 654.25,2827.9 v2(670,2812.15) 675.33,2812.15 681.87,2818.7 757.94,2818.7 768.43,2808.22 768.43,2782.51 768.43,2766.26 777.65,2757.03 U1R.10@797.46,2757.03 817.27,2757.03 830.24,2770 v2(845,2770) ; U1R.1@797.46,2615.3 822.49,2615.3 835.35,2602.44 v2(835.35,2599.55) ; C4R.1@553.27,2529.48 560.35,2536.56 561.14,2536.56 575.51,2550.93 U1R.44@575.51,2582.33 U1R.43@559.76,2582.33 559.76,2569.04 553.27,2562.55 C4R.1@553.27,2529.48
  Top Layer w9.84: v5@241.06,2698.94 v5(245,2695) ; U2R.8@644.47,2296.21 v5(717.24,2296.21) ; D1C.4@931.81,3095.62 931.52,3095.91 931.52,3148.33 C5C.1@933.92,3150.74
  Top Layer w10: C5C.1@931.8,3150.74 C5C.1@933.92,3150.74
  Top Layer w11.81: 488.9,3489.32 490.81,3491.23 542.1,3491.23 546.84,3486.49 574.6,3486.49 J1R.2@578.27,3482.82
  Top Layer w12: SB1.2@263.5,2230 305,2230 355,2280
  Top Layer w15: 119.31,4015.69 123.31,4015.69 ; 134.31,4030.69 138.31,4030.69 196.5,3972.5 R7.2@196.5,3970
  Top Layer w15.75: U1C.14@165.18,3140.4 C1C.1@165.18,3221.11 ; C3R.1@567.64,2296.21 U2R.8@644.47,2296.21
  Top Layer w20: U1C.14@165.67,3139.91 165.67,3123.75 209.42,3080 v1(210,3080) ; J12.2@330,1600 330,1760 530,1960 530,2225
  Top Layer w40: v5(339.29,3536.56) 311.78,3564.08 278.64,3564.08 270.49,3555.93 137.62,3555.93 100,3593.55 100,3996.38 119.31,4015.69 134.31,4030.69 269.49,4165.87 U1.4@269.49,4189.49 U1.2@519.49,4189.49 519.8,4189.18 619.84,4189.18 624.02,4185 C7.1@625,4185
  Bottom Layer w15.75: v4(418.03,2757.03) 450.91,2789.91 C9R.1@524.33,2789.91 525.02,2789.22 v2@559.76,2789.22 ; v4(536.14,2898.77) 560.16,2874.75 560.16,2839.29 559.76,2838.9 559.76,2796.4 v2(567.64,2788.53) ; v2(670,2812.15) 670,2817.48 681.92,2829.39 C8R.1@681.92,2858.02 ; v2(835.35,2599.55) C7R.1@873.35,2599.55 ; v2(874.72,2859.4) 845,2829.67 v2(845,2770) 876.13,2770 C6R.1@889.09,2757.03
  Bottom Layer w20: v1(80,3080) v1(210,3080)
  Bottom Layer w23.62: 561.63,2451.82 600.51,2490.7 C5R.1@654.25,2490.7 v2(654.25,2537.55)
  Bottom Layer w45.28: v5(243.94,2579.63) 245,2580.7 v5(245,2695) ; v5(339.29,3536.56) 363.11,3560.38 363.11,3610.03 390.04,3636.96 686.05,3636.96 713.37,3609.63 v5(713.94,3609.63) ; v5(425.91,2489.32) 524.13,2489.32 561.63,2451.82 v5(717.24,2296.21)
5V: C4C.1 C6.1 J6.4 U1.3 U2C.3 | length 1991.1
  Top Layer w15.75: C4C.1@238.31,3308.22 238.31,3309 256.78,3327.48 256.78,3335.94 v2(260.55,3339.71) 257.07,3343.19 257.07,3394.77 U2C.3@254.06,3397.78
  Top Layer w20: v1(90,3380) 90,3384.33 45,3429.33 45,4115 210.04,4280.04 U1.3@519.49,4280.04
  Top Layer w40: U1.3@519.49,4280.04 629.96,4280.04 C6.1@630,4280 815.35,4280 J6.4@879.29,4216.06
  Bottom Layer w15.75: v1(90,3380) 153.91,3316.09 233.73,3316.09 257.36,3339.71 v2(260.55,3339.71)
CANCLK_RP2CAN: U1C.6 U1R.32 | length 224.7
  Top Layer w7.87: U1C.6@415.67,2925.34 415.67,2839.33 482.22,2772.78 U1R.32@526.79,2772.78
CANH: J6.5 J6.6 SW1C.4 U2C.7 | length 1314.8
  Top Layer w7.87: U2C.7@204.06,3595.62 204.06,3649.06 380.63,3825.63 380.63,3837.74 SW1C.4@396.38,3853.49
  Top Layer w8: SW1C.4@411.06,3868.18 411.06,3891.12 557.63,4037.68 866.26,4037.68 J6.5@1044.65,4216.06
  Top Layer w10: SW1C.4@396.38,3853.49 SW1C.4@411.06,3868.18
  Bottom Layer w10: J6.5@1044.65,4216.06 J6.6@1210,4216.06
CANL: J6.2 J6.3 SW1C.1 U2C.6 | length 1668.6
  Top Layer w8: U2C.6@254.06,3595.62 U2C.6@254.06,3612.35 254.06,3629.08 332.8,3707.82 SW1C.1@396.38,3707.82 396.38,3719.63 427.94,3751.19 427.94,3884.13 563.81,4020 965,4020 1125,4180 1125,4352.24 J6.2@1044.65,4432.6
  Bottom Layer w8: J6.2@1044.65,4432.6 J6.3@1210,4432.6
CANRX_RP2CAN: U1C.2 U2C.4 | length 845.6
  Top Layer w7.87: U1C.2@215.67,2925.34 215.67,2908.61 192.05,2884.99 155.88,2884.99 126.1,2914.77 126.1,3419.97 144.27,3438.14 280.43,3438.14 304.06,3414.51 U2C.4@304.06,3397.78
CANTX_RP2CAN: U1C.1 U2C.1 | length 487.4
  Top Layer w7.87: U2C.1@154.06,3397.78 154.06,3295.44 141.85,3283.23 141.85,3113.59 165.67,3089.77 U1C.1@165.67,2925.34